# EAGLE board Untitled (EAGLE 7.1.0)
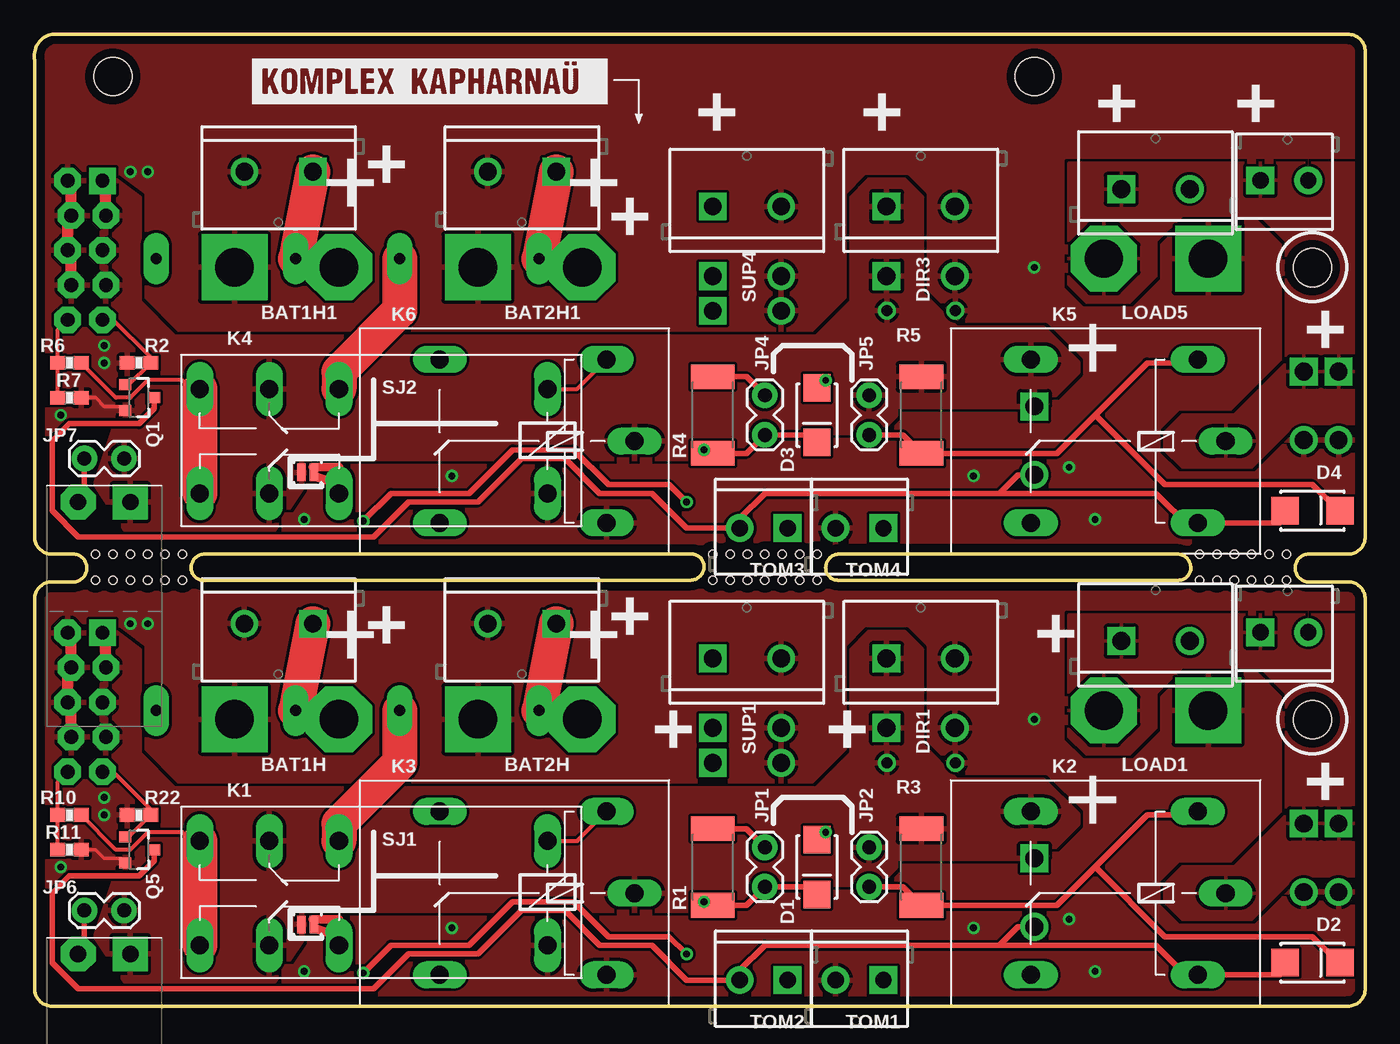
[diagram p0: board, top side]
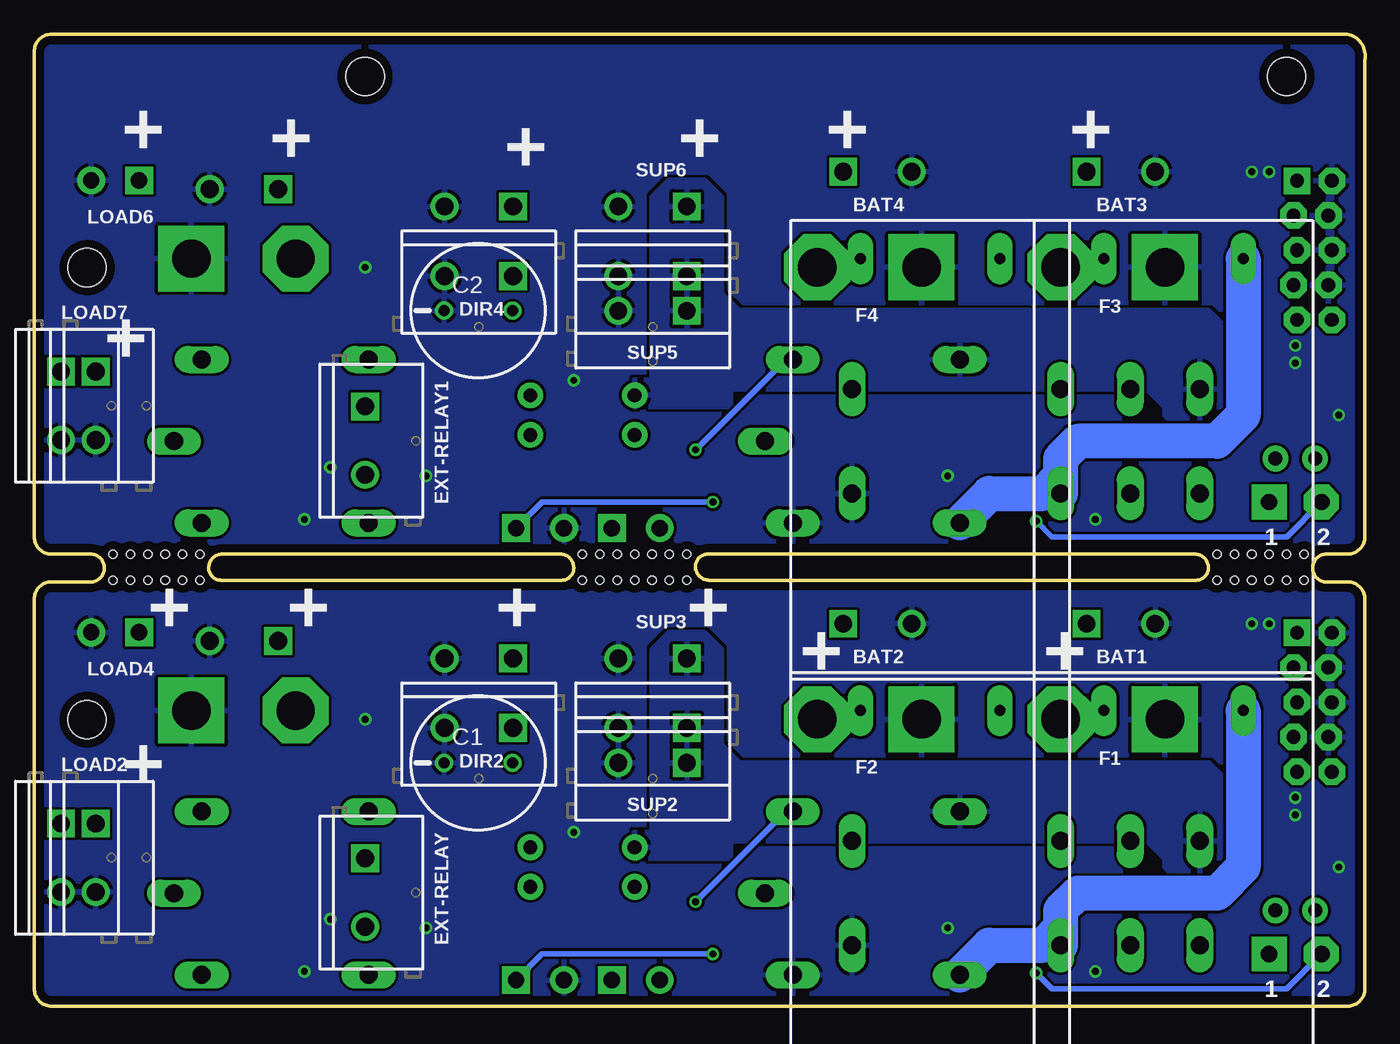
[diagram p1: board, bottom side, seen from below]

Size 97.23 x 71 mm. Coordinates in mm from the lower left corner, seen from the top.
Outline: 95.96,31 arc-90 97.23,29.73 97.23,1.27 arc-90 95.96,0 1.3,0 arc-90 0.03,1.27 0.03,29.73 arc-90 1.3,31
Outline: 1.3,30.99 2.84,30.99 arc90 3.84,31.99 3.84,32.02 arc90 2.84,33.02 1.3,33.02 arc-90 0.03,34.29 0.03,69.1 arc-90 1.3,71 95.96,71 arc-90 97.23,69.73 97.23,34.29 arc-90 95.96,33.02 93.11,33.02 arc90 92.11,32.02 92.11,31.99 arc90 93.11,30.99 95.92,30.99
Outline: 12.37,31.11 47.93,31.11 arc90 48.93,32.12 arc90 48.02,33.02 12.46,33.02 arc90 11.46,32.02 arc90 12.37,31.11
Outline: 58.72,31.11 83.58,31.11 arc90 84.49,32.02 arc90 83.49,33.02 58.82,33.02 arc90 57.82,32.02 arc90 58.72,31.11
Copper layers (1*16): Top 0.035mm / dielectric 1.5mm / Bottom 0.035mm
Design rules "default *": minimum track width 10mil, minimum drill 24mil, track to track 8mil, track to pad 8mil, pad to pad 8mil, via to via 8mil, smd to smd 8mil, copper to edge 24mil, drill to drill 8mil, minimum pad ring 10mil, minimum via ring 8mil, stop-mask expansion 4mil, vias tented up to drill 0mil, thermal gap 10mil
Net classes: 0 default: width 0.203 mm, clearance 0.203 mm; 1 GND: width 0.254 mm, clearance 0.203 mm; 3 5V: width 0.305 mm, clearance 0.203 mm; 4 230AC: width 0.61 mm, clearance 0.305 mm
Holes 2.8 mm at 93.38,20.93 93.38,53.95 73.06,67.92 5.75,67.92
Holes 0.6 mm at 4.48,31.11 5.75,31.11 7.02,31.11 8.29,31.11 9.56,31.11 10.83,31.11 91.47,31.11 90.2,31.11 88.93,31.11 87.66,31.11 86.39,31.11 85.12,31.11 49.56,31.11 50.83,31.11 52.1,31.11 53.37,31.11 54.64,31.11 55.91,31.11 57.18,31.11 4.48,33.02 5.75,33.02 7.02,33.02 8.29,33.02 9.56,33.02 10.83,33.02 57.18,33.02 55.91,33.02 54.64,33.02 53.37,33.02 52.1,33.02 50.83,33.02 49.56,33.02 85.12,33.02 86.39,33.02 87.66,33.02 88.93,33.02 90.2,33.02 91.47,33.02

## Footprints (pad centres in the part's own frame; a part is rotated, then mirrored left to right if it is on the bottom)
SCREWTERMINAL-5MM-2 = drill 1.3 pad 2.032 square: 1 0,0 | drill 1.3 pad 2.032: 2 5,0
2X1_HOLE_BIG = drill 2.8 pad 4.826 octagon: + 3.81,0 | drill 2.8 pad 4.826 square: _ -3.81,0
SANYO-OSCON_9F = drill 0.8 pad 1.27: + 2.5,0; - -2.5,0
SMA-DIODE_ALT = smd 2 x 2: A -2,0; C 2,0
PTC = drill 0.8 pad 1.88 long: P$1MOV -5.08,0; P$2 5.08,0
PLUG_02 = drill 1.2 pad 2.54 square: 1 -1.905,0 | drill 1.2 pad 2.54 octagon: 2 1.905,0
1X02_LOCK = drill 1.016 pad 1.88: 1 -0.178,0; 2 2.718,0
2X5_LOCK = drill 1.016 pad 1.93 octagon: 1 -5.08,-1.143; 2 -5.08,1.397; 3 -2.54,-1.397; 4 -2.54,1.143; 5 0,-1.143; 6 0,1.397; 7 2.54,-1.397; 8 2.54,1.143; 10 5.08,1.397 | drill 1.016 pad 1.93 square: 9 5.08,-1.143
F4052 = drill 1.321 long: 1 -3.81,3.81; 2 -3.81,-3.81; O1 11.43,-3.81; O2 11.43,3.81; P1 16.51,-3.81; P2 16.51,3.81; S1 21.59,-3.81; S2 21.59,3.81
G5LE = drill 1.321 long: 1 -7.493,-5.969; 2 -7.493,5.969; O 4.699,5.969; P -9.525,0; S 4.699,-5.969
SCREWTERMINAL-3.5MM-2 = drill 1.2 pad 2.032 square: 1 0,0 | drill 1.2 pad 2.032: 2 3.5,0
SOT23-3 = smd 0.8 x 0.9: 1 -0.95,-1; 2 0.95,-1; 3 0,1.1
R2512 = smd 1.8 x 3.2: 1 -2.8,0; 2 2.8,0
0603-RES = smd 1.1 x 1: 1 -0.85,0; 2 0.85,0
SJ_2S-NO = smd 0.635 x 1.27: 1 -0.45,0; 2 0.45,0

## Placement (x,y rotation side)
BAT1  M025MM  [SCREWTERMINAL-5MM-2]  20.35,27.94 180 top
BAT1H  M02HOLE  [2X1_HOLE_BIG]  18.45,20.95 0 top
BAT1H1  M02HOLE  [2X1_HOLE_BIG]  18.45,53.98 0 top
BAT2  M025MM  [SCREWTERMINAL-5MM-2]  38.13,27.94 180 top
BAT2H  M02HOLE  [2X1_HOLE_BIG]  36.23,20.95 0 top
BAT2H1  M02HOLE  [2X1_HOLE_BIG]  36.23,53.98 0 top
BAT3  M025MM  [SCREWTERMINAL-5MM-2]  20.35,60.96 180 top
BAT4  M025MM  [SCREWTERMINAL-5MM-2]  38.13,60.96 180 top
C1  [SANYO-OSCON_9F]  64.8,17.78 0 bottom
C2  [SANYO-OSCON_9F]  64.8,50.8 0 bottom
D1  [SMA-DIODE_ALT]  57.18,10.16 270 top
D2  [SMA-DIODE_ALT]  93.38,3.17 0 top
D3  [SMA-DIODE_ALT]  57.18,43.18 270 top
D4  [SMA-DIODE_ALT]  93.38,36.2 0 top
DIR1  M025MM  [SCREWTERMINAL-5MM-2]  62.26,25.4 0 top
DIR2  M025MM  [SCREWTERMINAL-5MM-2]  62.26,20.32 180 bottom
DIR3  M025MM  [SCREWTERMINAL-5MM-2]  62.26,58.42 0 top
DIR4  M025MM  [SCREWTERMINAL-5MM-2]  62.26,53.34 180 bottom
E$1  [KXKMLOGO2]  15.91,62.23 0 top
EXT-RELAY  M025MM  [SCREWTERMINAL-5MM-2]  73.06,10.79 270 bottom
EXT-RELAY1  M025MM  [SCREWTERMINAL-5MM-2]  73.06,43.81 270 bottom
F1  8A  [PTC]  14,21.59 180 bottom
F2  8A  [PTC]  31.78,21.59 180 bottom
F3  8A  [PTC]  14,54.61 180 bottom
F4  8A  [PTC]  31.78,54.61 180 bottom
INTER  M02PLUG  [PLUG_02]  5.11,3.81 180 top
INTER1  M02PLUG  [PLUG_02]  5.11,36.83 180 top
JP1  24/12  [1X02_LOCK]  53.37,11.43 270 top
JP2  24/12  [1X02_LOCK]  60.99,11.43 270 top
JP3  CHARGEUR  [2X5_LOCK]  3.84,22.2 90 top
JP4  24/12  [1X02_LOCK]  53.37,44.45 270 top
JP5  24/12  [1X02_LOCK]  60.99,44.45 270 top
JP6  ON  [1X02_LOCK]  3.84,6.99 0 top
JP7  ON  [1X02_LOCK]  3.84,40.01 0 top
JP8  CHARGEUR  [2X5_LOCK]  3.84,55.22 90 top
K1  4052  [F4052]  33.69,8.26 180 top
K2  G5L  [G5LE]  77.5,8.26 180 top
K3  G5L  [G5LE]  34.32,8.26 180 top
K4  4052  [F4052]  33.69,41.27 180 top
K5  G5L  [G5LE]  77.5,41.27 180 top
K6  G5L  [G5LE]  34.32,41.27 180 top
LOAD1  M025MM  [SCREWTERMINAL-5MM-2]  79.41,26.67 0 top
LOAD2  M025MM  [SCREWTERMINAL-5MM-2]  95.28,13.34 270 bottom
LOAD3  M025MM  [SCREWTERMINAL-5MM-2]  92.74,13.34 270 bottom
LOAD4  M023.5MM  [SCREWTERMINAL-3.5MM-2]  89.57,27.3 0 top
LOAD5  M025MM  [SCREWTERMINAL-5MM-2]  79.41,59.69 0 top
LOAD6  M023.5MM  [SCREWTERMINAL-3.5MM-2]  89.57,60.33 0 top
LOAD7  M025MM  [SCREWTERMINAL-5MM-2]  95.28,46.35 270 bottom
LOAD8  M025MM  [SCREWTERMINAL-5MM-2]  92.74,46.35 270 bottom
PLUG_3.81_2_1  M02HOLE  [2X1_HOLE_BIG]  81.95,54.61 180 top
PLUG_3.81_2_3  M02HOLE  [2X1_HOLE_BIG]  81.95,21.59 180 top
Q1  BSS138  [SOT23-3]  7.65,44.45 270 top
Q5  BSS138  [SOT23-3]  7.65,11.43 270 top
R1  390  [R2512]  49.56,10.16 90 top
R2  100K  [0603-RES]  7.65,46.99 0 top
R3  390  [R2512]  64.8,10.16 90 top
R4  390  [R2512]  49.56,43.18 90 top
R5  390  [R2512]  64.8,43.18 90 top
R6  100K  [0603-RES]  2.57,46.99 0 top
R7  10K  [0603-RES]  2.57,44.45 180 top
R10  100K  [0603-RES]  2.57,13.97 0 top
R11  10K  [0603-RES]  2.57,11.43 180 top
R22  100K  [0603-RES]  7.65,13.97 0 top
SJ1  ONLY BATT  [SJ_2S-NO]  19.97,5.97 0 top
SJ2  ONLY BATT  [SJ_2S-NO]  19.97,38.99 0 top
SUP1  M025MM  [SCREWTERMINAL-5MM-2]  49.56,25.4 0 top
SUP2  M025MM  [SCREWTERMINAL-5MM-2]  49.56,17.78 180 bottom
SUP3  M025MM  [SCREWTERMINAL-5MM-2]  49.56,20.32 180 bottom
SUP4  M025MM  [SCREWTERMINAL-5MM-2]  49.56,58.42 0 top
SUP5  M025MM  [SCREWTERMINAL-5MM-2]  49.56,50.8 180 bottom
SUP6  M025MM  [SCREWTERMINAL-5MM-2]  49.56,53.34 180 bottom
TOM1  M023.5MM  [SCREWTERMINAL-3.5MM-2]  62.03,1.91 180 top
TOM2  M023.5MM  [SCREWTERMINAL-3.5MM-2]  55.03,1.91 180 top
TOM3  M023.5MM  [SCREWTERMINAL-3.5MM-2]  55.03,34.92 180 top
TOM4  M023.5MM  [SCREWTERMINAL-3.5MM-2]  62.03,34.92 180 top

## Library data of the parts
BAT1-BAT4 DIR1-DIR4 EXT-RELAY EXT-RELAY1 LOAD1-LOAD3 LOAD5 LOAD7 LOAD8 SUP1-SUP6 = SparkFun-Connectors; STOREFRONT_ID: PRT-08432
BAT1H BAT1H1 BAT2H BAT2H1 E$1 INTER INTER1 PLUG_3.81_2_1 PLUG_3.81_2_3 = pierre_vv
C1 C2 R1 R3-R5 = rcl
D1-D4 = SparkFun-DiscreteSemi; OC_FARNELL: 2101190
F1-F4 = SparkFun; MOUNT: NO; OC_FARNELL: 1861144
JP1 JP2 JP4-JP7 SJ1 SJ2 = SparkFun
JP3 JP8 = pierre_vv; C: 1
K1 K4 = relay; OC_FARNELL: 1169304; OC_NEWARK: unknown
K2 K5 = relay; OC_FARNELL: unknown; OC_NEWARK: unknown
K3 K6 = relay; OC_FARNELL: 1455504; OC_NEWARK: unknown
LOAD4 LOAD6 TOM1-TOM4 = SparkFun-Connectors
Q1 Q5 = SparkFun-DiscreteSemi; C: 1; PROD_ID: TRANS-00830
R2 R6 R7 R10 R11 R22 = SparkFun-Passives; C: 1

## Nets
+TOM: INTER.2 JP6.1 TOM1.1
+TOM1: INTER1.2 JP7.1 TOM4.1
BATT1: F1.P$1MOV K1.O2 K3.O SJ1.2
BATT2: F2.P$1MOV K1.O1
BATT3: F3.P$1MOV K4.O2 K6.O SJ2.2
BATT4: F4.P$1MOV K4.O1
CHARGING: JP3.2 R10.1 R11.2
CHARGING1: JP8.2 R6.1 R7.2
GND [GND]: BAT1.2 BAT1H._ BAT2.2 BAT2H._ C1.- D1.A DIR1.2 DIR2.2 JP3.4 JP3.6 JP3.8 JP3.10 K1.1 K3.2 LOAD1.2 LOAD2.2 LOAD3.2 LOAD4.2 PLUG_3.81_2_3._ Q5.2 R11.1 R22.1 SUP1.2 SUP2.2 SUP3.2 TOM1.2
GND1 [GND]: BAT1H1._ BAT2H1._ BAT3.2 BAT4.2 C2.- D3.A DIR3.2 DIR4.2 JP8.4 JP8.6 JP8.8 JP8.10 K4.1 K6.2 LOAD5.2 LOAD6.2 LOAD7.2 LOAD8.2 PLUG_3.81_2_1._ Q1.2 R2.1 R7.1 SUP4.2 SUP5.2 SUP6.2 TOM4.2
LOAD: K2.P LOAD1.1 LOAD2.1 LOAD3.1 LOAD4.1 PLUG_3.81_2_3.+
LOAD1: K5.P LOAD5.1 LOAD6.1 LOAD7.1 LOAD8.1 PLUG_3.81_2_1.+
N$1: D1.C JP1.2 K1.2 K3.1 R1.1
N$2: BAT1.1 BAT1H.+ F1.P$2
N$3: BAT2.1 BAT2H.+ F2.P$2
N$4: D2.C JP2.2 K2.1 R3.1
N$5: D3.C JP4.2 K4.2 K6.1 R4.1
N$6: D4.C JP5.2 K5.1 R5.1
N$7: BAT1H1.+ BAT3.1 F3.P$2
N$8: BAT2H1.+ BAT4.1 F4.P$2
RELAY_CHARGE_BOARD: JP3.1 Q5.1 R22.2
RELAY_CHARGE_BOARD1: JP8.1 Q1.1 R2.2
SINK_FROM_TOM: D2.A EXT-RELAY.2 K2.2 Q5.3 TOM2.2
SINK_FROM_TOM1: D4.A EXT-RELAY1.2 K5.2 Q1.3 TOM3.2
SUPPLY: JP1.1 K1.S1 K1.S2 K3.S R1.2 R10.2 SUP1.1 SUP2.1 SUP3.1
SUPPLY1: JP4.1 K4.S1 K4.S2 K6.S R4.2 R6.2 SUP4.1 SUP5.1 SUP6.1
SUPPLY/BATT: C1.+ DIR1.1 DIR2.1 EXT-RELAY.1 INTER.1 JP2.1 JP3.3 JP3.5 JP3.7 JP3.9 JP6.2 K1.P1 K1.P2 K2.S K3.P R3.2 SJ1.1
SUPPLY/BATT1: C2.+ DIR3.1 DIR4.1 EXT-RELAY1.1 INTER1.1 JP5.1 JP7.2 JP8.3 JP8.5 JP8.7 JP8.9 K4.P1 K4.P2 K5.S K6.P R5.2 SJ2.1

## Tracks (layer width: path | path; a pad name or v marks a point on that pad's centre or on a via)
+TOM  (via drill 0.5)
  Top 0.254: JP6.1 3.66,4.27 INTER.2
  Top 0.406: JP6.1 3.66,3.35 | v24.03,2.41 26.07,4.45 31.78,4.45 34.96,7.62 39.4,7.62 41.94,5.08 46.39,5.08 v47.66,3.81
  Bottom 0.406: v47.66,3.81 60.13,3.81 TOM1.1 | v24.03,2.41 22.89,1.27 5.75,1.27 INTER.2
+TOM1  (via drill 0.5)
  Top 0.254: JP7.1 3.66,37.29 INTER1.2
  Top 0.406: JP7.1 3.66,36.37 | v24.03,35.43 26.07,37.47 31.78,37.47 34.96,40.64 39.4,40.64 41.94,38.1 46.39,38.1 v47.66,36.83
  Bottom 0.406: v47.66,36.83 60.13,36.83 TOM4.1 | v24.03,35.43 22.89,34.29 5.75,34.29 INTER1.2
BATT1
  Top 0.406: 20.35,6.35 20.35,5.97 SJ1.2 20.42,5.71 | 22.26,3.17 K1.O2 22.26,5.08
  Top 0.61: 20.35,6.35 22.26,6.35 | 22.26,5.08 20.42,5.71
  Bottom 2.54: K3.O 27.46,4.45 23.53,4.45 22.26,5.71 | F1.P$1MOV 8.92,10.16 10.83,8.26 20.99,8.26 22.26,6.99 22.26,5.71 | 22.26,5.71 K1.O2
BATT2
  Top 2.54: F2.P$1MOV 26.7,17.78 22.26,13.34 K1.O1
BATT3
  Top 0.406: 20.35,39.37 20.35,38.99 SJ2.2 20.42,38.73 | 22.26,36.2 K4.O2 22.26,38.1
  Top 0.61: 20.35,39.37 22.26,39.37 | 22.26,38.1 20.42,38.73
  Bottom 2.54: K6.O 27.46,37.47 23.53,37.47 22.26,38.73 | F3.P$1MOV 8.92,43.18 10.83,41.27 20.99,41.27 22.26,40.01 22.26,38.73 | 22.26,38.73 K4.O2
BATT4
  Top 2.54: F4.P$1MOV 26.7,50.8 22.26,46.35 K4.O1
CHARGING
  Top 0.305: R11.2 R10.1 1.72,16.4 JP3.2
CHARGING1
  Top 0.305: R7.2 R6.1 1.72,49.42 JP8.2
GND  (via drill 0.5)
  Top 0.254: D1.A 57.28,12.16 v57.82,12.7 | 3.21,11.43 R11.1 4.48,11.43 5.11,10.79 6.34,10.79 Q5.2
  Top 0.813: JP3.4 2.7,21.95 JP3.6 2.44,24.49 JP3.8 2.7,27.03 JP3.10
  other vias: 1.94,10.16 5.11,13.97 5.11,15.24 8.29,27.94 7.02,27.94 75.6,6.35 68.61,5.71 73.06,20.95 30.51,5.71 19.72,2.54 77.5,2.54
  pour Bottom (rank 4): -1.24,31.75 99.73,31.75 99.73,-1.91 -1.24,-1.91
  pour Top (rank 4): -2.51,33.66 102.27,33.66 102.27,-4.45 -2.51,-4.45
GND1  (via drill 0.5)
  Top 0.254: D3.A 57.28,45.18 v57.82,45.72 | 3.21,44.45 R7.1 4.48,44.45 5.11,43.81 6.34,43.81 Q1.2
  Top 0.813: JP8.4 2.7,54.97 JP8.6 2.44,57.51 JP8.8 2.7,60.05 JP8.10
  other vias: 1.94,43.18 5.11,46.99 5.11,48.26 8.29,60.96 7.02,60.96 75.6,39.37 68.61,38.73 73.06,53.98 30.51,38.73 19.72,35.56 77.5,35.56
  pour Bottom (rank 4): -1.24,73.03 99.73,73.03 99.73,31.11 -1.24,31.11
  pour Top (rank 4): -2.51,72.39 102.27,72.39 102.27,28.57 -2.51,28.57
LOAD
  pour Top: 75.6,19.68 75.6,28.57 97.82,28.57 97.82,9.53 92.11,9.53 88.93,6.35 83.85,6.35 82.58,7.62 82.58,8.89 83.85,10.16 87.66,10.16 91.47,13.97 91.47,22.86 89.57,24.77 83.85,24.77 81.95,22.86 81.95,20.32 80.04,18.41 76.87,18.41
LOAD1
  pour Top: 75.6,52.7 75.6,61.59 97.82,61.59 97.82,42.55 92.11,42.55 88.93,39.37 83.85,39.37 82.58,40.64 82.58,41.91 83.85,43.18 87.66,43.18 91.47,46.99 91.47,55.88 89.57,57.78 83.85,57.78 81.95,55.88 81.95,53.34 80.04,51.44 76.87,51.44
N$1  (via drill 0.5)
  Top 0.305: K1.2 39.66,12.06 K3.1 | R1.1 49.19,7.36 v48.93,7.62 | 56.63,8.71 D1.C
  Top 0.406: R1.1 52.02,7.36 JP1.2 56.63,8.71
  Bottom 0.305: K3.1 42.32,14.22
  Bottom 0.406: 42.32,14.22 v48.93,7.62
N$2
  Top 2.54: BAT1.1 F1.P$2 BAT1H.+
N$3
  Top 2.54: BAT2.1 F2.P$2 BAT2H.+
N$4
  Top 0.254: 84.74,13.97 K2.1 | D2.C 95.28,3.17
  Top 0.406: JP2.2 63.45,8.71 R3.1 74.7,7.36 77.5,10.16 | 77.5,10.16 81.31,13.97 84.74,13.97 | 95.28,3.17 93.38,5.08 82.58,5.08 77.5,10.16
N$5  (via drill 0.5)
  Top 0.305: K4.2 39.66,45.09 K6.1 | R4.1 49.19,40.38 v48.93,40.64 | 56.63,41.73 D3.C
  Top 0.406: R4.1 52.02,40.38 JP4.2 56.63,41.73
  Bottom 0.305: K6.1 42.32,47.24
  Bottom 0.406: 42.32,47.24 v48.93,40.64
N$6
  Top 0.254: 84.74,46.99 K5.1 | D4.C 95.28,36.2
  Top 0.406: JP5.2 63.45,41.73 R5.1 74.7,40.38 77.5,43.18 | 77.5,43.18 81.31,46.99 84.74,46.99 | 95.28,36.2 93.38,38.1 82.58,38.1 77.5,43.18
N$7
  Top 2.54: BAT3.1 F3.P$2 BAT1H1.+
N$8
  Top 2.54: BAT4.1 F4.P$2 BAT2H1.+
RELAY_CHARGE_BOARD
  Top 0.305: Q5.1 6.91,12.38 R22.2 8.5,14.39 5.75,17.14 5.01,17.14 JP3.1
RELAY_CHARGE_BOARD1
  Top 0.305: Q1.1 6.91,45.4 R2.2 8.5,47.41 5.75,50.16 5.01,50.16 JP8.1
SINK_FROM_TOM
  Top 0.254: 84.49,1.91 84.61,1.91 | 91,2.29 D2.A
  Top 0.406: 84.49,1.91 81.95,4.45 70.52,4.45 | 84.61,1.91 K2.2 91,2.29 | 70.52,4.45 53.37,4.45 51.53,2.6 TOM2.2 47.66,1.91 45.12,4.45 41.31,4.45 38.77,6.99 35.59,6.99 32.42,3.81 27.34,3.81 24.8,1.27 3.21,1.27 1.3,3.17 1.3,8.26 2.57,9.53 7.65,9.53 8.75,10.62 Q5.3 | EXT-RELAY.2 71.87,5.79 70.52,4.45
SINK_FROM_TOM1
  Top 0.254: 84.49,34.92 84.61,34.92 | 91,35.31 D4.A
  Top 0.406: 84.49,34.92 81.95,37.47 70.52,37.47 | 84.61,34.92 K5.2 91,35.31 | 70.52,37.47 53.37,37.47 51.53,35.62 TOM3.2 47.66,34.92 45.12,37.47 41.31,37.47 38.77,40.01 35.59,40.01 32.42,36.83 27.34,36.83 24.8,34.29 3.21,34.29 1.3,36.2 1.3,41.27 2.57,42.55 7.65,42.55 8.75,43.65 Q1.3 | EXT-RELAY1.2 71.87,38.81 70.52,37.47
SUPPLY
  Top 0.305: K1.S1 11.46,12.06 10.83,12.7 8.29,12.7 7.02,11.43 5.96,11.43 R10.2
  Top 0.406: R1.2 52.02,12.96 JP1.1
  Top 2.54: K1.S1 K1.S2
  pour Bottom: 10.19,8.89 10.19,16.51 11.46,17.78 45.75,17.78 47.02,19.05 47.02,26.04 48.29,27.3 50.83,27.3 52.1,26.04 52.1,12.7 53.37,12.7 53.37,10.79 46.39,10.79 46.39,12.06 15.91,12.06 14.64,10.79 14.64,10.16 13.37,8.89
SUPPLY1
  Top 0.305: K4.S1 11.46,45.09 10.83,45.72 8.29,45.72 7.02,44.45 5.96,44.45 R6.2
  Top 0.406: R4.2 52.02,45.98 JP4.1
  Top 2.54: K4.S1 K4.S2
  pour Bottom: 10.19,41.91 10.19,49.53 11.46,50.8 45.75,50.8 47.02,52.07 47.02,59.05 48.29,60.33 50.83,60.33 52.1,59.05 52.1,45.72 53.37,45.72 53.37,43.81 46.39,43.81 46.39,45.09 15.91,45.09 14.64,43.81 14.64,43.18 13.37,41.91
SUPPLY/BATT
  Top 0.813: JP3.7 5.24,27.03 JP3.9
  pour Top: 4.48,27.94 5.11,17.78 7.65,14.61 4.48,5.08 7.02,1.27 17.18,1.27 19.72,5.08 21.62,6.99 57.82,6.99 57.82,8.89 61.63,8.89 62.9,10.16 62.9,10.79 73.69,10.79 76.23,13.34 76.23,13.97 73.69,16.51 67.34,16.51 64.8,19.05 64.8,26.04 63.53,27.3 60.99,27.3 59.72,26.04 59.72,18.41 57.18,15.88 10.19,15.88 7.65,18.41 7.65,26.04 5.11,27.94
SUPPLY/BATT1
  Top 0.813: JP8.7 5.24,60.05 JP8.9
  pour Top: 4.48,60.96 5.11,50.8 7.65,47.62 4.48,38.1 7.02,34.29 17.18,34.29 19.72,38.1 21.62,40.01 57.82,40.01 57.82,41.91 61.63,41.91 62.9,43.18 62.9,43.81 73.69,43.81 76.23,46.35 76.23,46.99 73.69,49.53 67.34,49.53 64.8,52.07 64.8,59.05 63.53,60.33 60.99,60.33 59.72,59.05 59.72,51.44 57.18,48.9 10.19,48.9 7.65,51.44 7.65,59.05 5.11,60.96

## Text on the board
tPlace: + | + | + | + | + | + | + | + | + | + | + | + | +
bPlace: + | + | + | + | + | + | + | + | + | + | + | + | + | +
_tNames: SUP1 | DIR1 | BAT1H | K3 | BAT2H | R3 | K2 | LOAD1 | JP1 | JP2 | R10 | R22 | K1 | R11 | SJ1 | Q5 | JP6 | R1 | D1 | D2 | TOM2 | TOM1 | SUP1 | DIR1 | BAT1H | K3 | BAT2H | R3 | K2 | LOAD1 | JP1 | JP2 | R10 | R22 | K1 | R11 | SJ1 | Q5 | JP6 | R1 | D1 | D2 | TOM2 | TOM1
_bNames: SUP3 | BAT1 | BAT2 | LOAD4 | F1 | C1 | F2 | DIR2 | LOAD2 | SUP2 | EXT-RELAY | SUP3 | BAT1 | BAT2 | LOAD4 | F1 | C1 | F2 | DIR2 | LOAD2 | SUP2 | EXT-RELAY